# Altium PCB lab04.PcbDoc
Units mil, origin at the board's own origin, x right, y up, seen from the top; angles counter-clockwise.
Board outline 15347.11 x 6024.06 mil, 2 copper layers (Top Layer, Top, Bottom Layer, Bottom); 38 components, 0 nets, 194 pads, 0 vias.
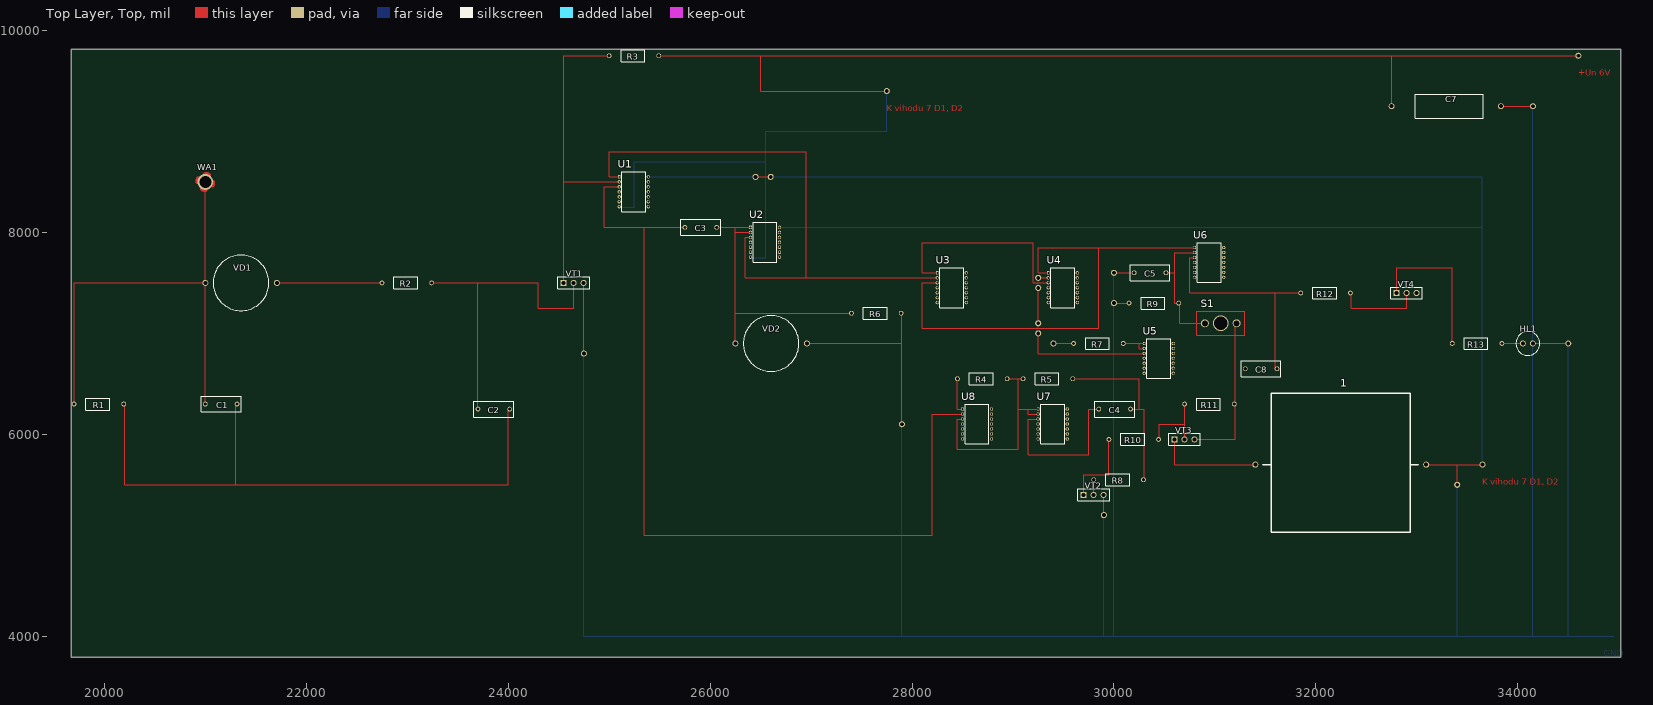
[diagram p0: Top Layer, Top view]
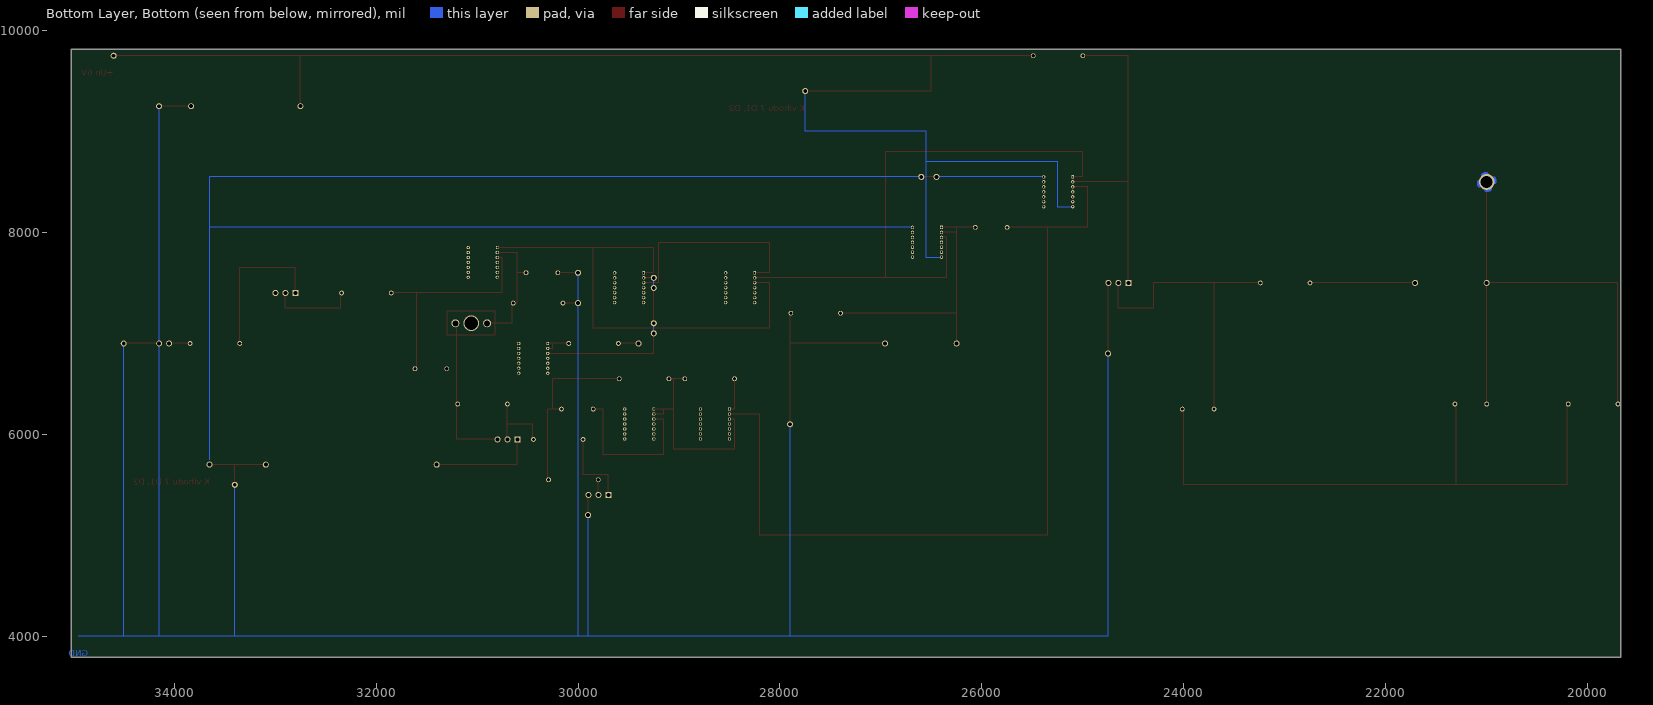
[diagram p1: Bottom Layer, Bottom view, seen from below]

## Layer stack, top to bottom
Top Solder, Top Mask: solder mask 0.4, Solder Resist, Dk 3.5
Top Layer, Top: signal copper 1.4
Dielectric 1: dielectric 12.6, FR-4, Dk 4.8
Bottom Layer, Bottom: signal copper 1.4
Bottom Solder, Bot Mask: solder mask 0.4, Solder Resist, Dk 3.5

## Board outline
19672.38,3790 35019.49,3790 35019.49,9814.06 19672.38,9814.06

## Design rules (kind name [scope] priority, off if disabled: settings)
Clearance [All] p1: gap=10 ignorepadtopadclearanceinfootprint=FALSE except(0: Arc-Hole Track-Hole SMDPad-Hole THPad-Hole Via-Hole Fill-Hole Poly-Hole Region-Hole Text-Hole; 12: Arc-Arc Arc-Track Arc-THPad Arc-Via Track-Track Track-THPad Track-Via THPad-THPad THPad-Via Via-Via)
PlaneClearance [All] p1: clearance=10
PolygonConnect [All] p1: connectstyle=Relief reliefconductorwidth=10 reliefentries=4 polygonreliefangle="90 Angle" airgapwidth=10
RoutingVias [All] p1: holewidth=28 width=50 viastyle="Through Hole" minholewidth=28 minwidth=50 maxholewidth=28 maxwidth=50
SolderMaskExpansion [All] p1: expansion=4
Width [All] p1: maxlimit=10 minlimit=10 preferedwidth=10
29 further rules are at their usual default settings.

## Components (designator, comment, footprint, x,y, rotation, side; value= is the part's Value field where it differs from the comment)
1 "HA1 FMQ" ЗП-3 31400,5700 r0 top
C1 "0.1mk" "K71-6 (10X4)" 21000,6300 r0 top
C2 "4700" "K71-6 (10X4)" 23700,6250 r0 top
C3 "4700" "K71-6 (10X4)" 25750,8050 r0 top
C4 "0.01mk" "K71-6 (10X4)" 29850,6250 r0 top
C5 "0.22mk" "K71-6 (10X4)" 30200,7600 r0 top
C7 "1000mk 16B" "К50-29 (17Х6)" 32750,9250 r0 top
C8 "0.01mk" "K71-6 (10X4)" 31300,6650 r0 top
HL1 "{Value}" АЛ307 34050,6900 r0 top
R1 "1k" МЛТ(0.125) 19700,6300 r0 top
R2 "10k" МЛТ(0.125) 22750,7500 r0 top
R3 "75k" МЛТ(0.125) 25000,9750 r0 top
R4 "430k" МЛТ(0.125) 28450,6550 r0 top
R5 "51k" МЛТ(0.125) 29100,6550 r0 top
R6 "3k" МЛТ(0.125) 27400,7200 r0 top
R7 "68k" МЛТ(0.125) 29600,6900 r0 top
R8 "3.3k" МЛТ(0.125) 29800,5550 r0 top
R9 "3k" МЛТ(0.125) 30150,7300 r0 top
R10 "510" МЛТ(0.125) 29950,5950 r0 top
R11 "10k" МЛТ(0.125) 30700,6300 r0 top
R12 "10k" МЛТ(0.125) 31850,7400 r0 top
R13 "430" МЛТ(0.125) 33350,6900 r0 top
S1 "" TRN 30900,7100 r0 top
U1 "" КР1564ЛА3 25100,8550 r0 top
U2 "" КР1564ЛА3 26400,8050 r0 top
U3 "" КР1564ЛА3 28250,7600 r0 top
U4 "" КР1564ЛА3 29350,7600 r0 top
U5 "" КР1564ЛА3 30300,6900 r0 top
U6 "" КР1564ЛА3 30800,7850 r0 top
U7 "" КР1564ЛА3 29250,6250 r0 top
U8 "" КР1564ЛА3 28500,6250 r0 top
VD1 "{Value}" КД213 21000,7500 r0 top
VD2 "{Value}" КД213 26250,6900 r0 top
VT1 "{Value}" КT315 24550,7500 r0 top
VT2 "{Value}" КT315 29700,5400 r0 top
VT3 "{Value}" КT315 30600,5950 r0 top
VT4 "{Value}" КT315 32800,7400 r0 top
WA1 "{Value}" АНТЕННА 21000,8500 r0 top

## Footprints (in the part's own frame and the unit in brackets; to place one, negate y for a bottom-side part, rotate by r counter-clockwise, add the part's x,y. Pads: shape width x height; smd on the part's side, far side on the other; paste and mask are expansions set on the pad)
"K71-6 (10X4)" [mm]
  round 1.2 hole 0.8: 1(0,0) 2(8,0)
  silkscreen extent -1,-2 9,2
TRN [mm]
  round 2 hole 1.5: 1(0,0) 2(8,0)
  round 4 hole 3.5: 3(4,0)
  Top Layer, Top lines w0.1: -2,-3 10,-3 10,3 -2,3 -2,-3
АЛ307 [mm]
  round 1.5 hole 1: 1(0,0) 2(2.5,0)
  silkscreen extent -1.75,-3 4.25,3
АНТЕННА [mm]
  round 4 hole 3: 1(0,0)
  Top Layer, Top lines w1: -2,0 cw(c0,0) -1.788,0.896 ; -0.896,-1.788 ccw(c0,0) 0,-2 ; 0,2 cw(c0,0) 0.896,1.788 ; 1.788,-0.896 ccw(c0,0) 2,0
  Bottom Layer, Bottom lines w1: -2,0 cw(c0,0) -1.788,0.896 ; -0.896,-1.788 ccw(c0,0) 0,-2 ; 0,2 cw(c0,0) 0.896,1.788 ; 1.788,-0.896 ccw(c0,0) 2,0
ЗП-3 [mil]
  round 60 hole 39.37: 1(0,0) 2(1692.91,0)
  silkscreen extent 76,-669 1615,709
"К50-29 (17Х6)" [mm]
  round 1.5 hole 1: 1(0,0) 2(27.5,0)
  silkscreen extent 6,-3 23,3
КT315 [mm]
  rect 1.5x1.5 hole 1: 1(0,0)
  round 1.5 hole 1: 2(2.5,0) 3(5,0)
  silkscreen extent -1.5,-1.5 6.5,1.5
КД213 [mm]
  round 1.5 hole 1: 1(0,0) 2(18,0)
  silkscreen extent 2,-7 16,7
КР1564ЛА3 [mm]
  rect 0.68x0.83 hole 0.5: 1(0,0)
  round 0.83 hole 0.5: 2(0,-1.25) 3(0,-2.5) 4(0,-3.75) 5(0,-5) 6(0,-6.25) 7(0,-7.5) 8(7.3,-7.5) 9(7.3,-6.25) 10(7.3,-5) 11(7.3,-3.75) 12(7.3,-2.5) 13(7.3,-1.25) 14(7.3,0)
  silkscreen extent 0.65,-8.75 6.65,1.25
МЛТ(0.125) [mm]
  round 1.2 hole 0.8: 1(0,0) 2(12.5,0)
  silkscreen extent 3,-1.5 9,1.5

## Free pads (board coordinates)
  round 60 hole 38: 0(24750,6800) 0(26450,8550) 0(26600,8550) 0(27750,9400) 0(27900,6100) 0(29250,7000) 0(29250,7100) 0(29250,7450) 0(29250,7550) 0(29400,6900) 0(29900,5200) 0(30000,7300) 0(30000,7600) 0(33400,5500) 0(33650,5700) 0(34150,9250) 0(34500,6900) 0(34600,9750)

## Nets (pads, with @x,y where several pads share a name; then routed paths per layer and width w, separated by ;. In a path a pad name is that pad's centre, name@x,y a point inside that pad or via, vN(x,y) a via of type N, cw(c..) or ccw(c..) an arc to the next point about the centre after c; other vN are vias at no path point)
pads on no net: 1.1 1.2 C1.1 C1.2 C2.1 C2.2 C3.1 C3.2 C4.1 C4.2 C5.1 C5.2 C7.1 C7.2 C8.1 C8.2 HL1.1 HL1.2 R1.1 R1.2 R2.1 R2.2 R3.1 R3.2 R4.1 R4.2 R5.1 R5.2 R6.1 R6.2 R7.1 R7.2 R8.1 R8.2 R9.1 R9.2 R10.1 R10.2 R11.1 R11.2 R12.1 R12.2 R13.1 R13.2 S1.1 S1.2 S1.3 U1.1 U1.2 U1.3 U1.4 U1.5 U1.6 U1.7 U1.8 U1.9 U1.10 U1.11 U1.12 U1.13 U1.14 U2.1 U2.2 U2.3 U2.4 U2.5 U2.6 U2.7 U2.8 U2.9 U2.10 U2.11 U2.12 U2.13 U2.14 U3.1 U3.2 U3.3 U3.4 U3.5 U3.6 U3.7 U3.8 U3.9 U3.10 U3.11 U3.12 U3.13 U3.14 U4.1 U4.2 U4.3 U4.4 U4.5 U4.6 U4.7 U4.8 U4.9 U4.10 U4.11 U4.12 U4.13 U4.14 U5.1 U5.2 U5.3 U5.4 U5.5 U5.6 U5.7 U5.8 U5.9 U5.10 U5.11 U5.12 U5.13 U5.14 U6.1 U6.2 U6.3 U6.4 U6.5 U6.6 U6.7 U6.8 U6.9 U6.10 U6.11 U6.12 U6.13 U6.14 U7.1 U7.2 U7.3 U7.4 U7.5 U7.6 U7.7 U7.8 U7.9 U7.10 U7.11 U7.12 U7.13 U7.14 U8.1 U8.2 U8.3 U8.4 U8.5 U8.6 U8.7 U8.8 U8.9 U8.10 U8.11 U8.12 U8.13 U8.14 VD1.1 VD1.2 VD2.1 VD2.2 VT1.1 VT1.2 VT1.3 VT2.1 VT2.2 VT2.3 VT3.1 VT3.2 VT3.3 VT4.1 VT4.2 VT4.3 WA1.1
copper on no net: | length 130200
  Top Layer, Top w10: 19700,6300 19700,7500 21000,7500 21000,8450 ; 20200,6300 20200,5500 21350,5500 ; 21000,6300 21000,7550 ; 21300,6300 21300,5500 24000,5500 24000,5700 ; 21700,7500 22750,7500 ; 23250,7500 23500,7500 23700,7500 ; 23700,6250 23700,7500 ; 24000,5600 24000,6250 ; 24550,7500 24550,8500 25100,8500 ; 24550,8450 24550,9750 25000,9750 ; 24650,7500 24650,7250 24300,7250 24300,7500 23700,7500 ; 24750,6800 24750,7500 ; 25100,8450 24950,8450 24950,8050 25600,8050 25750,8050 ; 25100,8550 25000,8550 25000,8800 26950,8800 26950,7550 ; 25350,8050 25350,5000 28200,5000 28200,6200 28500,6200 ; 25500,9750 34600,9750 ; 26050,8050 26400,8050 ; 26250,6900 26250,8050 ; 26250,7200 27400,7200 ; 26250,8000 26400,8000 ; 26400,7950 26350,7950 26350,7550 26950,7550 ; 26450,8550 26600,8550 ; 26500,9750 26500,9400 27750,9400 ; 26950,6900 27900,6900 ; 27900,6100 27900,7200 ; 28250,7500 28100,7500 28100,7050 29850,7050 29850,7850 ; 28250,7550 26950,7550 ; 28250,7600 28100,7600 28100,7900 29200,7900 29200,7500 29350,7500 ; 28450,6550 28450,6250 28500,6250 ; 28500,6150 28450,6150 28450,5850 29050,5850 29050,6250 ; 28950,6550 29050,6550 ; 29100,6550 29050,6550 ; 29250,6150 29150,6150 29150,5800 29750,5800 29750,6250 29850,6250 ; 29250,6200 29150,6200 29150,6250 ; 29250,6250 29150,6250 ; 29250,7000 29250,6800 30300,6800 ; 29250,7100 29250,7450 ; 29250,7550 29350,7550 ; 29350,7600 29250,7600 29250,7850 29850,7850 ; 29400,6900 29600,6900 ; 29600,6550 30250,6550 30250,6250 ; 29700,5400 29700,5600 29950,5600 29950,5950 ; 29800,5400 29800,5550 ; 29900,5200 29900,5400 ; 30000,7300 30150,7300 ; 30000,7600 30200,7600 ; 30100,6900 30250,6900 ; 30150,6250 30250,6250 ; 30300,5550 30300,6250 30250,6250 ; 30300,6850 30250,6850 30250,6900 ; 30300,6900 30250,6900 ; 30450,5950 30450,6100 30700,6100 ; 30500,7600 30600,7600 ; 30600,5950 30600,5700 31400,5700 ; 30700,5950 30700,6100 ; 30700,6300 30700,6100 ; 30800,5950 31200,5950 31200,7100 ; 30800,7750 30750,7750 30750,7400 31850,7400 ; 30800,7800 30600,7800 30600,7600 ; 30800,7850 29850,7850 ; 30900,7100 30650,7100 30650,7300 30600,7300 30600,7600 ; 31600,6650 31600,7400 ; 32350,7400 32350,7250 32900,7250 32900,7400 ; 32750,9250 32750,9750 ; 32800,7400 32800,7550 32800,7650 33350,7650 33350,6900 ; 33100,5700 33650,5700 ; 33400,5500 33400,5700 ; 33850,6900 34050,6900 ; 33850,9250 34150,9250 ; 34150,6900 34500,6900 ; 29050,6250 29150,6250 ; 29050,6250 29050,6550
  Bottom Layer, Bottom w10: 24750,6800 24750,4000 34950,4000 ; 25100,8250 25250,8250 25250,8700 26550,8700 ; 25400,8550 26450,8550 ; 26400,7750 26550,7750 26550,9000 27750,9000 27750,9400 ; 26600,8550 33650,8550 33650,5750 ; 26700,8050 33650,8050 ; 27900,4000 27900,6100 ; 29250,7000 29250,7100 ; 29250,7450 29250,7550 ; 29900,4000 29900,5200 ; 30000,4000 30000,7300 30000,7600 ; 33400,4000 33400,5500 ; 34150,4000 34150,9250 ; 34500,4000 34500,6900

## Other copper
Top Layer, Top:
  text "+Un 6V" at 34600,9550 h62.5
  text "K vihodu 7 D1, D2" at 27750,9200 h62.5
  text "K vihodu 7 D1, D2" at 33650,5500 h62.5
Bottom Layer, Bottom:
  text "GND" at 34850,3800 h62.5